# EAGLE board IOB-Signal_array (EAGLE 7.7.0)
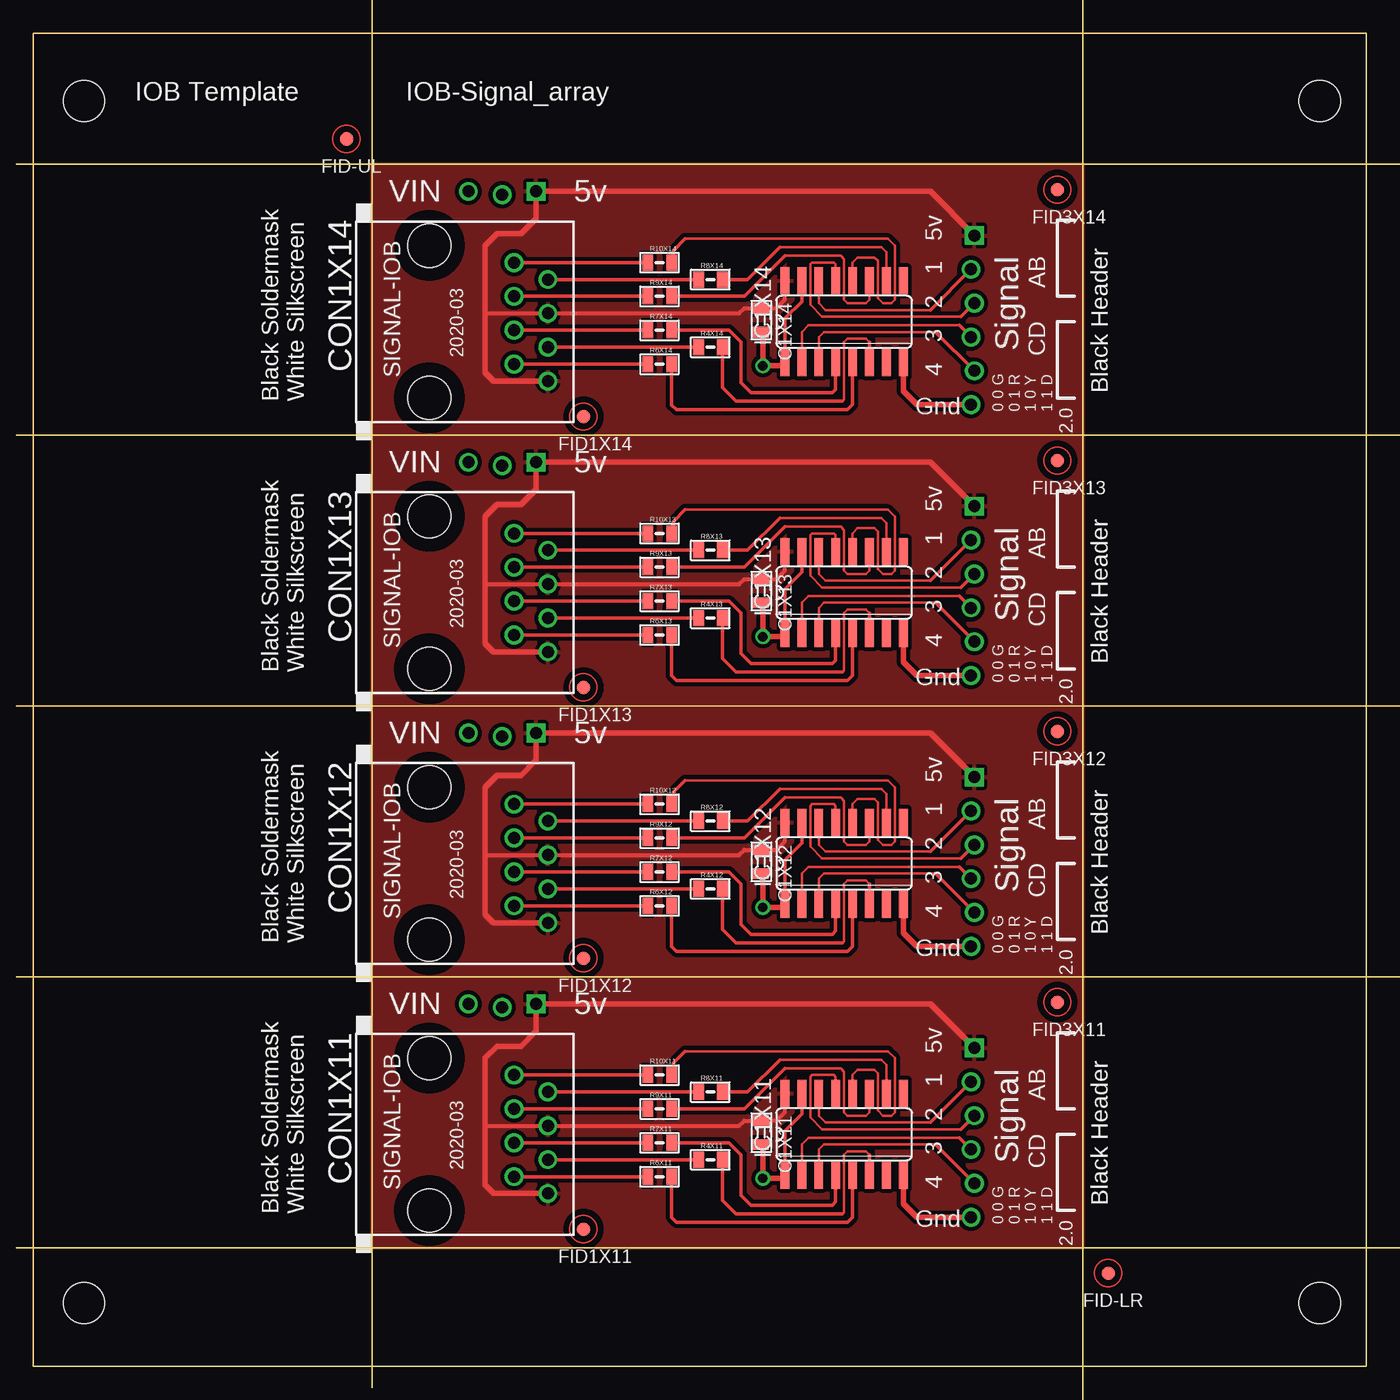
[diagram p0: board, top side]
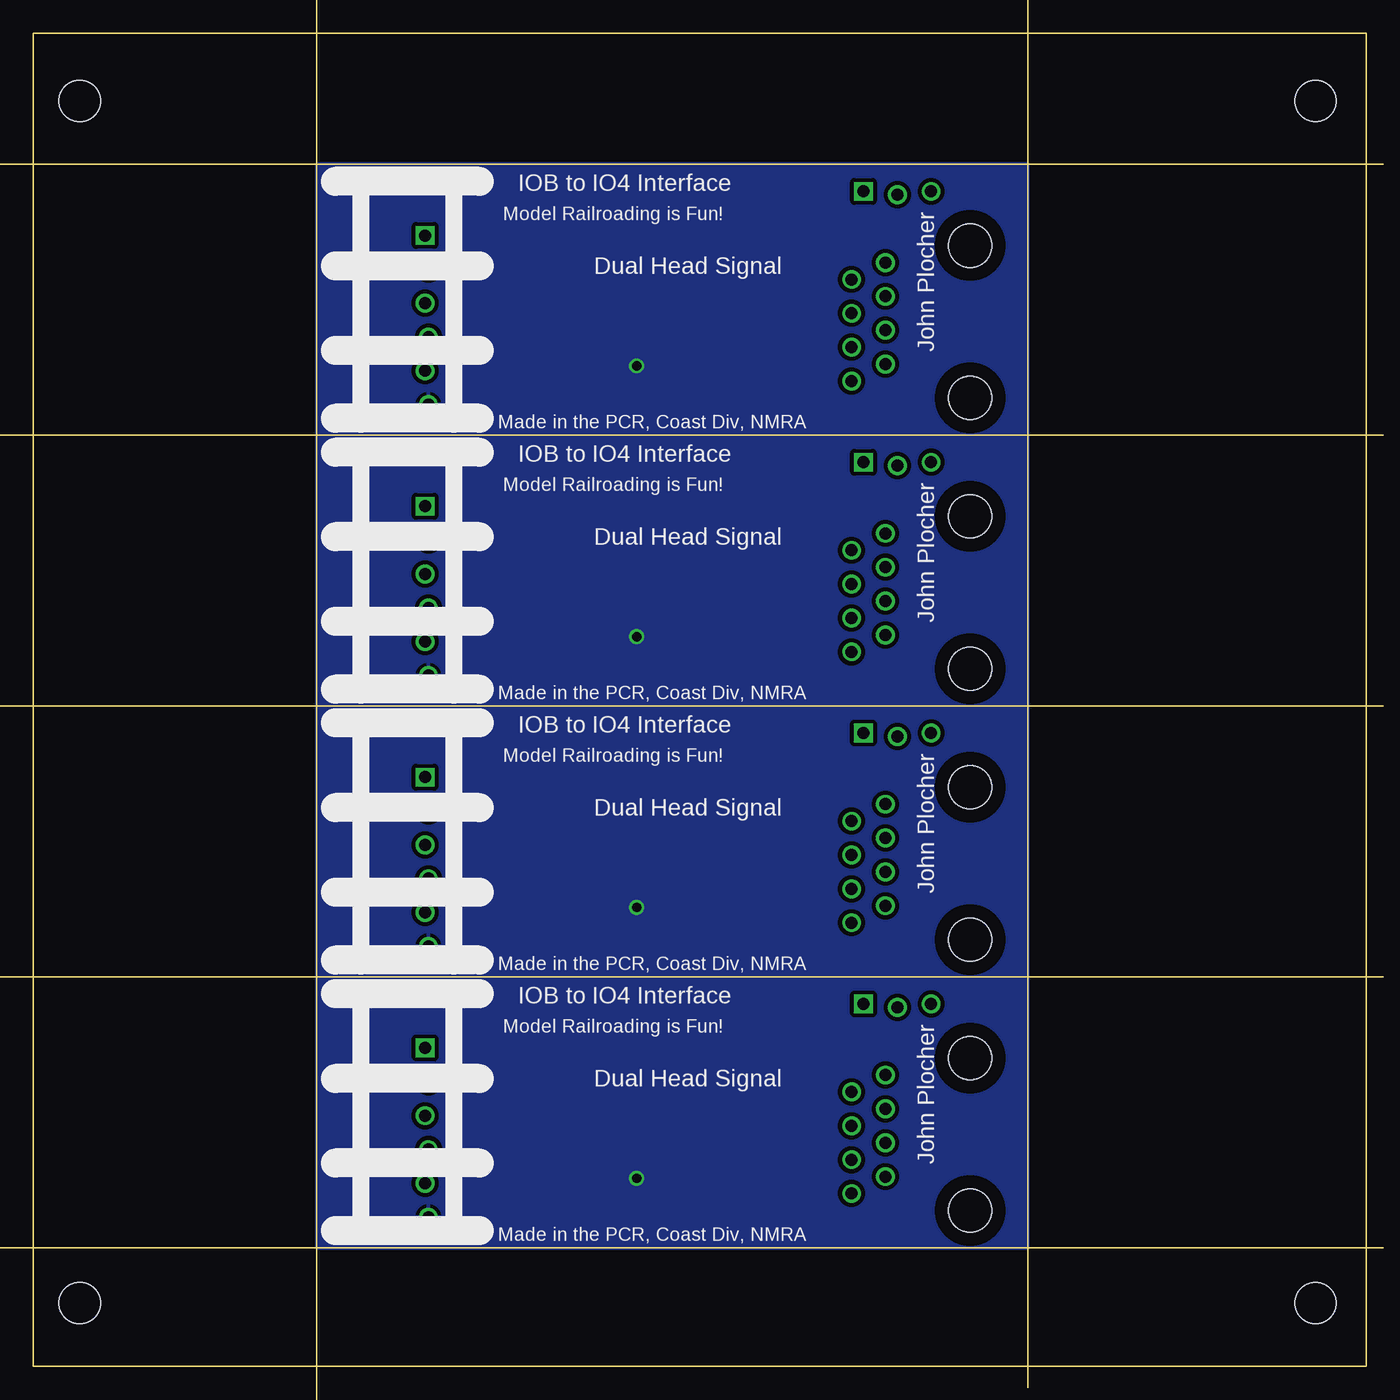
[diagram p1: board, bottom side, seen from below]

Size 100 x 100 mm. Coordinates in mm from the lower left corner, seen from the top.
Copper layers (1*16): Top 0.035mm / dielectric 1.5mm / Bottom 0.035mm
Design rules "default": minimum track width 10mil, minimum drill 0.6mm, track to track 8mil, track to pad 8mil, pad to pad 8mil, via to via 8mil, smd to smd 8mil, copper to edge 40mil, drill to drill 8mil, minimum pad ring 10mil, minimum via ring 8mil, stop-mask expansion 4mil, vias tented up to drill 0mil, thermal gap 10mil
Milling: 3 lines

## Footprints (pad centres in the part's own frame; a part is rotated, then mirrored left to right if it is on the bottom)
0805-CAP = smd 0.8 x 1.2: 1 -0.9,0; 2 0.9,0
RJ45-NO-SHIELD = drill 0.9 pad 1.4: 1 -4.445,6.35; 2 -3.175,8.89; 3 -1.905,6.35; 4 -0.635,8.89; 5 0.635,6.35; 6 1.905,8.89; 7 3.175,6.35; 8 4.445,8.89 | hole 3.251: -5.715,0; 5.715,0
FIDUCIAL_1MM = smd 1 x 1: 1 0,0
SO16 = smd 0.66 x 2.032: 1 -4.445,-3.073; 2 -3.175,-3.073; 3 -1.905,-3.073; 4 -0.635,-3.073; 5 0.635,-3.073; 6 1.905,-3.073; 7 3.175,-3.073; 8 4.445,-3.073; 9 4.445,3.073; 10 3.175,3.073; 11 1.905,3.073; 12 0.635,3.073; 13 -0.635,3.073; 14 -1.905,3.073; 15 -3.175,3.073; 16 -4.445,3.073
0805-RES = smd 0.8 x 1.2: 1 -0.9,0; 2 0.9,0
BOARD-DINRAIL-3.17IN-H4X-IOB = hole 3.1: 96.52,94.92; 96.52,4.75; 3.81,94.92; 3.81,4.75
IO4-IOB = drill 0.9: G@3 44.958,2.286; P1 44.958,12.446; P2 45.212,9.906; P3 44.958,7.366; P4 45.212,4.826; V+ 7.239,18.288; VOUT 9.779,18.034 | drill 0.9 square: V5 12.319,18.288; V5@1 45.212,14.986

## Placement (x,y rotation side)
C1X11  0.1UF  [0805-CAP]  54.61,17.53 270 top
C1X12  0.1UF  [0805-CAP]  54.61,37.85 270 top
C1X13  0.1UF  [0805-CAP]  54.61,58.17 270 top
C1X14  0.1UF  [0805-CAP]  54.61,78.49 270 top
CON1X11  RJ45  [RJ45-NO-SHIELD]  29.72,17.4 270 top
CON1X12  RJ45  [RJ45-NO-SHIELD]  29.72,37.72 270 top
CON1X13  RJ45  [RJ45-NO-SHIELD]  29.72,58.04 270 top
CON1X14  RJ45  [RJ45-NO-SHIELD]  29.72,78.36 270 top
FID1X11  FIDUCIAL  [FIDUCIAL_1MM]  41.27,10.29 0 top
FID1X12  FIDUCIAL  [FIDUCIAL_1MM]  41.27,30.61 0 top
FID1X13  FIDUCIAL  [FIDUCIAL_1MM]  41.27,50.93 0 top
FID1X14  FIDUCIAL  [FIDUCIAL_1MM]  41.27,71.25 0 top
FID3X11  FIDUCIAL  [FIDUCIAL_1MM]  76.83,27.3 0 top
FID3X12  FIDUCIAL  [FIDUCIAL_1MM]  76.83,47.62 0 top
FID3X13  FIDUCIAL  [FIDUCIAL_1MM]  76.83,67.94 0 top
FID3X14  FIDUCIAL  [FIDUCIAL_1MM]  76.83,88.27 0 top
FID-LR  FIDUCIAL  [FIDUCIAL_1MM]  80.64,6.99 0 top
FID-UL  FIDUCIAL  [FIDUCIAL_1MM]  23.5,92.08 0 top
IC1X11  74HS139A  [SO16]  60.83,17.4 0 top
IC1X12  74HS139A  [SO16]  60.83,37.72 0 top
IC1X13  74HS139A  [SO16]  60.83,58.04 0 top
IC1X14  74HS139A  [SO16]  60.83,78.36 0 top
R4X11  420R  [0805-RES]  50.8,15.49 0 top
R4X12  420R  [0805-RES]  50.8,35.81 0 top
R4X13  420R  [0805-RES]  50.8,56.13 0 top
R4X14  420R  [0805-RES]  50.8,76.45 0 top
R6X11  1K0  [0805-RES]  46.99,14.22 0 top
R6X12  1K0  [0805-RES]  46.99,34.54 0 top
R6X13  1K0  [0805-RES]  46.99,54.86 0 top
R6X14  1K0  [0805-RES]  46.99,75.18 0 top
R7X11  1K0  [0805-RES]  46.99,16.76 0 top
R7X12  1K0  [0805-RES]  46.99,37.08 0 top
R7X13  1K0  [0805-RES]  46.99,57.4 0 top
R7X14  1K0  [0805-RES]  46.99,77.72 0 top
R8X11  420R  [0805-RES]  50.8,20.57 0 top
R8X12  420R  [0805-RES]  50.8,40.89 0 top
R8X13  420R  [0805-RES]  50.8,61.21 0 top
R8X14  420R  [0805-RES]  50.8,81.53 0 top
R9X11  1K0  [0805-RES]  46.99,19.3 0 top
R9X12  1K0  [0805-RES]  46.99,39.62 0 top
R9X13  1K0  [0805-RES]  46.99,59.94 0 top
R9X14  1K0  [0805-RES]  46.99,80.26 0 top
R10X11  1K0  [0805-RES]  46.99,21.84 0 top
R10X12  1K0  [0805-RES]  46.99,42.16 0 top
R10X13  1K0  [0805-RES]  46.99,62.48 0 top
R10X14  1K0  [0805-RES]  46.99,82.8 0 top
U$1X1  [BOARD-DINRAIL-3.17IN-H4X-IOB]  0,0 0 top
U$1X11  CONNECTOR-IO4-IOBBARE  [IO4-IOB]  25.4,8.89 0 top
U$1X12  CONNECTOR-IO4-IOBBARE  [IO4-IOB]  25.4,29.21 0 top
U$1X13  CONNECTOR-IO4-IOBBARE  [IO4-IOB]  25.4,49.53 0 top
U$1X14  CONNECTOR-IO4-IOBBARE  [IO4-IOB]  25.4,69.85 0 top

## Library data of the parts
C1X11-C1X14 CON1X11-CON1X14 FID1X11-FID1X14 FID3X11-FID3X14 FID-LR FID-UL IC1X11-IC1X14 R4X11-R4X14 R6X11-R6X14 R7X11-R7X14 R8X11-R8X14 R9X11-R9X14 R10X11-R10X14 U$1X1 U$1X11-U$1X14 = SPCoast

## Nets
G1-LEDX11: CON1X11.1 R10X11.1
G1-LEDX12: CON1X12.1 R10X12.1
G1-LEDX13: CON1X13.1 R10X13.1
G1-LEDX14: CON1X14.1 R10X14.1
G1X11: IC1X11.12 R10X11.2
G1X12: IC1X12.12 R10X12.2
G1X13: IC1X13.12 R10X13.2
G1X14: IC1X14.12 R10X14.2
G2-LEDX11: CON1X11.5 R7X11.1
G2-LEDX12: CON1X12.5 R7X12.1
G2-LEDX13: CON1X13.5 R7X13.1
G2-LEDX14: CON1X14.5 R7X14.1
G2X11: IC1X11.4 R7X11.2
G2X12: IC1X12.4 R7X12.2
G2X13: IC1X13.4 R7X13.2
G2X14: IC1X14.4 R7X14.2
GNDX11: C1X11.2 IC1X11.1 IC1X11.8 IC1X11.15 U$1X11.G@3
GNDX12: C1X12.2 IC1X12.1 IC1X12.8 IC1X12.15 U$1X12.G@3
GNDX13: C1X13.2 IC1X13.1 IC1X13.8 IC1X13.15 U$1X13.G@3
GNDX14: C1X14.2 IC1X14.1 IC1X14.8 IC1X14.15 U$1X14.G@3
P1X11: IC1X11.14 U$1X11.P1
P1X12: IC1X12.14 U$1X12.P1
P1X13: IC1X13.14 U$1X13.P1
P1X14: IC1X14.14 U$1X14.P1
P2X11: IC1X11.13 U$1X11.P2
P2X12: IC1X12.13 U$1X12.P2
P2X13: IC1X13.13 U$1X13.P2
P2X14: IC1X14.13 U$1X14.P2
P3X11: IC1X11.2 U$1X11.P3
P3X12: IC1X12.2 U$1X12.P3
P3X13: IC1X13.2 U$1X13.P3
P3X14: IC1X14.2 U$1X14.P3
P4X11: IC1X11.3 U$1X11.P4
P4X12: IC1X12.3 U$1X12.P4
P4X13: IC1X13.3 U$1X13.P4
P4X14: IC1X14.3 U$1X14.P4
R1-LEDX11: CON1X11.3 R9X11.1
R1-LEDX12: CON1X12.3 R9X12.1
R1-LEDX13: CON1X13.3 R9X13.1
R1-LEDX14: CON1X14.3 R9X14.1
R1X11: IC1X11.11 R9X11.2
R1X12: IC1X12.11 R9X12.2
R1X13: IC1X13.11 R9X13.2
R1X14: IC1X14.11 R9X14.2
R2-LEDX11: CON1X11.7 R6X11.1
R2-LEDX12: CON1X12.7 R6X12.1
R2-LEDX13: CON1X13.7 R6X13.1
R2-LEDX14: CON1X14.7 R6X14.1
R2X11: IC1X11.5 R6X11.2
R2X12: IC1X12.5 R6X12.2
R2X13: IC1X13.5 R6X13.2
R2X14: IC1X14.5 R6X14.2
VCCIOX11: U$1X11.V+
VCCIOX12: U$1X12.V+
VCCIOX13: U$1X13.V+
VCCIOX14: U$1X14.V+
VCCX11: C1X11.1 CON1X11.4 CON1X11.8 IC1X11.16 U$1X11.V5 U$1X11.V5@1
VCCX12: C1X12.1 CON1X12.4 CON1X12.8 IC1X12.16 U$1X12.V5 U$1X12.V5@1
VCCX13: C1X13.1 CON1X13.4 CON1X13.8 IC1X13.16 U$1X13.V5 U$1X13.V5@1
VCCX14: C1X14.1 CON1X14.4 CON1X14.8 IC1X14.16 U$1X14.V5 U$1X14.V5@1
Y1-LEDX11: CON1X11.2 R8X11.1
Y1-LEDX12: CON1X12.2 R8X12.1
Y1-LEDX13: CON1X13.2 R8X13.1
Y1-LEDX14: CON1X14.2 R8X14.1
Y1X11: IC1X11.10 R8X11.2
Y1X12: IC1X12.10 R8X12.2
Y1X13: IC1X13.10 R8X13.2
Y1X14: IC1X14.10 R8X14.2
Y2-LEDX11: CON1X11.6 R4X11.1
Y2-LEDX12: CON1X12.6 R4X12.1
Y2-LEDX13: CON1X13.6 R4X13.1
Y2-LEDX14: CON1X14.6 R4X14.1
Y2X11: IC1X11.6 R4X11.2
Y2X12: IC1X12.6 R4X12.2
Y2X13: IC1X13.6 R4X13.2
Y2X14: IC1X14.6 R4X14.2

## Tracks (layer width: path | path; a pad name or v marks a point on that pad's centre or on a via)
G1-LEDX11
  Top 0.254: CON1X11.1 R10X11.1
G1-LEDX12
  Top 0.254: CON1X12.1 R10X12.1
G1-LEDX13
  Top 0.254: CON1X13.1 R10X13.1
G1-LEDX14
  Top 0.254: CON1X14.1 R10X14.1
G1X11
  Top 0.203: IC1X11.12 61.47,21.84 61.85,22.23 63.12,22.23 63.37,21.97 63.37,19.18 63.75,18.8 64.39,18.8 64.64,19.05 64.64,23.11 64.14,23.62 48.9,23.62
  Top 0.254: R10X11.2 48.02,22.74 48.9,23.62
G1X12
  Top 0.203: IC1X12.12 61.47,42.16 61.85,42.55 63.12,42.55 63.37,42.29 63.37,39.5 63.75,39.12 64.39,39.12 64.64,39.37 64.64,43.43 64.14,43.94 48.9,43.94
  Top 0.254: R10X12.2 48.02,43.06 48.9,43.94
G1X13
  Top 0.203: IC1X13.12 61.47,62.48 61.85,62.87 63.12,62.87 63.37,62.61 63.37,59.82 63.75,59.44 64.39,59.44 64.64,59.69 64.64,63.75 64.14,64.26 48.9,64.26
  Top 0.254: R10X13.2 48.02,63.38 48.9,64.26
G1X14
  Top 0.203: IC1X14.12 61.47,82.8 61.85,83.19 63.12,83.19 63.37,82.93 63.37,80.14 63.75,79.76 64.39,79.76 64.64,80.01 64.64,84.07 64.14,84.58 48.9,84.58
  Top 0.254: R10X14.2 48.02,83.7 48.9,84.58
G2-LEDX11
  Top 0.254: CON1X11.5 R7X11.1
G2-LEDX12
  Top 0.254: CON1X12.5 R7X12.1
G2-LEDX13
  Top 0.254: CON1X13.5 R7X13.1
G2-LEDX14
  Top 0.254: CON1X14.5 R7X14.1
G2X11
  Top 0.254: R7X11.2 52.2,16.76 53.09,15.88 53.09,12.83 53.85,12.06 59.94,12.06 60.2,12.32 IC1X11.4
G2X12
  Top 0.254: R7X12.2 52.2,37.08 53.09,36.2 53.09,33.15 53.85,32.38 59.94,32.38 60.2,32.64 IC1X12.4
G2X13
  Top 0.254: R7X13.2 52.2,57.4 53.09,56.52 53.09,53.47 53.85,52.7 59.94,52.7 60.2,52.96 IC1X13.4
G2X14
  Top 0.254: R7X14.2 52.2,77.72 53.09,76.83 53.09,73.79 53.85,73.03 59.94,73.03 60.2,73.28 IC1X14.4
GNDX11  (via drill 0.7 pad 1.11)
  Top 0.254: IC1X11.15 57.66,18.92 56.39,17.65 IC1X11.1 | C1X11.2 54.62,16.64
  Top 0.406: IC1X11.8 65.28,12.19 66.29,11.18 U$1X11.G@3 | 54.62,16.64 54.74,16.52 v54.74,14.1 56.16,14.1 IC1X11.1
  pour Bottom (isolate 0.305): 25.4,8.89 25.4,29.21 78.74,29.21 78.74,8.89
GNDX12  (via drill 0.7 pad 1.11)
  Top 0.254: IC1X12.15 57.66,39.24 56.39,37.97 IC1X12.1 | C1X12.2 54.62,36.96
  Top 0.406: IC1X12.8 65.28,32.51 66.29,31.5 U$1X12.G@3 | 54.62,36.96 54.74,36.84 v54.74,34.42 56.16,34.42 IC1X12.1
  pour Bottom (isolate 0.305): 25.4,29.21 25.4,49.53 78.74,49.53 78.74,29.21
GNDX13  (via drill 0.7 pad 1.11)
  Top 0.254: IC1X13.15 57.66,59.56 56.39,58.29 IC1X13.1 | C1X13.2 54.62,57.28
  Top 0.406: IC1X13.8 65.28,52.83 66.29,51.82 U$1X13.G@3 | 54.62,57.28 54.74,57.16 v54.74,54.74 56.16,54.74 IC1X13.1
  pour Bottom (isolate 0.305): 25.4,49.53 25.4,69.85 78.74,69.85 78.74,49.53
GNDX14  (via drill 0.7 pad 1.11)
  Top 0.254: IC1X14.15 57.66,79.88 56.39,78.61 IC1X14.1 | C1X14.2 54.62,77.6
  Top 0.406: IC1X14.8 65.28,73.15 66.29,72.14 U$1X14.G@3 | 54.62,77.6 54.74,77.48 v54.74,75.06 56.16,75.06 IC1X14.1
  pour Bottom (isolate 0.305): 25.4,69.85 25.4,90.17 78.74,90.17 78.74,69.85
P1X11
  Top 0.203: 67.31,18.29 59.44,18.29 58.93,18.8 IC1X11.14
  Top 0.254: 67.31,18.29 U$1X11.P1
P1X12
  Top 0.203: 67.31,38.61 59.44,38.61 58.93,39.12 IC1X12.14
  Top 0.254: 67.31,38.61 U$1X12.P1
P1X13
  Top 0.203: 67.31,58.93 59.44,58.93 58.93,59.44 IC1X13.14
  Top 0.254: 67.31,58.93 U$1X13.P1
P1X14
  Top 0.203: 67.31,79.25 59.44,79.25 58.93,79.76 IC1X14.14
  Top 0.254: 67.31,79.25 U$1X14.P1
P2X11
  Top 0.203: 69.6,17.78 59.18,17.78 58.29,18.67 58.29,21.72 58.42,21.84 60.07,21.84 60.2,21.72 IC1X11.13
  Top 0.254: 69.6,17.78 U$1X11.P2
P2X12
  Top 0.203: 69.6,38.1 59.18,38.1 58.29,38.99 58.29,42.04 58.42,42.16 60.07,42.16 60.2,42.04 IC1X12.13
  Top 0.254: 69.6,38.1 U$1X12.P2
P2X13
  Top 0.203: 69.6,58.42 59.18,58.42 58.29,59.31 58.29,62.36 58.42,62.48 60.07,62.48 60.2,62.36 IC1X13.13
  Top 0.254: 69.6,58.42 U$1X13.P2
P2X14
  Top 0.203: 69.6,78.74 59.18,78.74 58.29,79.63 58.29,82.68 58.42,82.8 60.07,82.8 60.2,82.68 IC1X14.13
  Top 0.254: 69.6,78.74 U$1X14.P2
P3X11
  Top 0.203: 69.47,17.14 58.17,17.14 57.66,16.64 IC1X11.2
  Top 0.254: 69.47,17.14 U$1X11.P3
P3X12
  Top 0.203: 69.47,37.47 58.17,37.47 57.66,36.96 IC1X12.2
  Top 0.254: 69.47,37.47 U$1X12.P3
P3X13
  Top 0.203: 69.47,57.78 58.17,57.78 57.66,57.28 IC1X13.2
  Top 0.254: 69.47,57.78 U$1X13.P3
P3X14
  Top 0.203: 69.47,78.11 58.17,78.11 57.66,77.6 IC1X14.2
  Top 0.254: 69.47,78.11 U$1X14.P3
P4X11
  Top 0.203: 67.69,16.64 59.31,16.64 58.93,16.26 IC1X11.3
  Top 0.254: 67.69,16.64 U$1X11.P4
P4X12
  Top 0.203: 67.69,36.96 59.31,36.96 58.93,36.58 IC1X12.3
  Top 0.254: 67.69,36.96 U$1X12.P4
P4X13
  Top 0.203: 67.69,57.28 59.31,57.28 58.93,56.9 IC1X13.3
  Top 0.254: 67.69,57.28 U$1X13.P4
P4X14
  Top 0.203: 67.69,77.6 59.31,77.6 58.93,77.22 IC1X14.3
  Top 0.254: 67.69,77.6 U$1X14.P4
R1-LEDX11
  Top 0.254: CON1X11.3 R9X11.1
R1-LEDX12
  Top 0.254: CON1X12.3 R9X12.1
R1-LEDX13
  Top 0.254: CON1X13.3 R9X13.1
R1-LEDX14
  Top 0.254: CON1X14.3 R9X14.1
R1X11
  Top 0.203: IC1X11.11 62.74,19.05 62.48,18.8 61.09,18.8 60.83,19.05 60.83,22.1 60.58,22.35 56.39,22.35
  Top 0.254: R9X11.2 53.34,19.3 56.39,22.35
R1X12
  Top 0.203: IC1X12.11 62.74,39.37 62.48,39.12 61.09,39.12 60.83,39.37 60.83,42.42 60.58,42.67 56.39,42.67
  Top 0.254: R9X12.2 53.34,39.62 56.39,42.67
R1X13
  Top 0.203: IC1X13.11 62.74,59.69 62.48,59.44 61.09,59.44 60.83,59.69 60.83,62.74 60.58,62.99 56.39,62.99
  Top 0.254: R9X13.2 53.34,59.94 56.39,62.99
R1X14
  Top 0.203: IC1X14.11 62.74,80.01 62.48,79.76 61.09,79.76 60.83,80.01 60.83,83.06 60.58,83.31 56.39,83.31
  Top 0.254: R9X14.2 53.34,80.26 56.39,83.31
R2-LEDX11
  Top 0.254: CON1X11.7 R6X11.1
R2-LEDX12
  Top 0.254: CON1X12.7 R6X12.1
R2-LEDX13
  Top 0.254: CON1X13.7 R6X13.1
R2-LEDX14
  Top 0.254: CON1X14.7 R6X14.1
R2X11
  Top 0.254: R6X11.2 47.89,11.16 48.26,10.79 61.09,10.79 61.47,11.18 IC1X11.5
R2X12
  Top 0.254: R6X12.2 47.89,31.48 48.26,31.11 61.09,31.11 61.47,31.5 IC1X12.5
R2X13
  Top 0.254: R6X13.2 47.89,51.8 48.26,51.44 61.09,51.44 61.47,51.82 IC1X13.5
R2X14
  Top 0.254: R6X14.2 47.89,72.12 48.26,71.75 61.09,71.75 61.47,72.14 IC1X14.5
VCCX11
  Top 0.305: IC1X11.16 56.39,19.05 55.76,18.43 C1X11.1 54.6,18.41 53.34,18.41 52.96,18.03 33.91,18.03
  Top 0.406: CON1X11.8 34.54,12.95 33.91,13.59 33.91,18.03 33.91,23.11 34.8,24 36.58,24 37.72,25.15 U$1X11.V5 67.31,27.18 U$1X11.V5@1
  pour Top (isolate 0.305): 25.4,8.89 25.4,29.21 78.74,29.21 78.74,8.89
VCCX12
  Top 0.305: IC1X12.16 56.39,39.37 55.76,38.75 C1X12.1 54.6,38.73 53.34,38.73 52.96,38.35 33.91,38.35
  Top 0.406: CON1X12.8 34.54,33.27 33.91,33.91 33.91,38.35 33.91,43.43 34.8,44.32 36.58,44.32 37.72,45.47 U$1X12.V5 67.31,47.5 U$1X12.V5@1
  pour Top (isolate 0.305): 25.4,29.21 25.4,49.53 78.74,49.53 78.74,29.21
VCCX13
  Top 0.305: IC1X13.16 56.39,59.69 55.76,59.07 C1X13.1 54.6,59.05 53.34,59.05 52.96,58.67 33.91,58.67
  Top 0.406: CON1X13.8 34.54,53.59 33.91,54.23 33.91,58.67 33.91,63.75 34.8,64.64 36.58,64.64 37.72,65.79 U$1X13.V5 67.31,67.82 U$1X13.V5@1
  pour Top (isolate 0.305): 25.4,49.53 25.4,69.85 78.74,69.85 78.74,49.53
VCCX14
  Top 0.305: IC1X14.16 56.39,80.01 55.76,79.39 C1X14.1 54.6,79.38 53.34,79.38 52.96,78.99 33.91,78.99
  Top 0.406: CON1X14.8 34.54,73.91 33.91,74.55 33.91,78.99 33.91,84.07 34.8,84.96 36.58,84.96 37.72,86.11 U$1X14.V5 67.31,88.14 U$1X14.V5@1
  pour Top (isolate 0.305): 25.4,69.85 25.4,90.17 78.74,90.17 78.74,69.85
Y1-LEDX11
  Top 0.254: CON1X11.2 R8X11.1
Y1-LEDX12
  Top 0.254: CON1X12.2 R8X12.1
Y1-LEDX13
  Top 0.254: CON1X13.2 R8X13.1
Y1-LEDX14
  Top 0.254: CON1X14.2 R8X14.1
Y1X11
  Top 0.203: 56.01,22.99 63.63,22.99 64.01,22.61 IC1X11.10
  Top 0.254: R8X11.2 53.59,20.57 56.01,22.99
Y1X12
  Top 0.203: 56.01,43.31 63.63,43.31 64.01,42.93 IC1X12.10
  Top 0.254: R8X12.2 53.59,40.89 56.01,43.31
Y1X13
  Top 0.203: 56.01,63.63 63.63,63.63 64.01,63.25 IC1X13.10
  Top 0.254: R8X13.2 53.59,61.21 56.01,63.63
Y1X14
  Top 0.203: 56.01,83.95 63.63,83.95 64.01,83.57 IC1X14.10
  Top 0.254: R8X14.2 53.59,81.53 56.01,83.95
Y2-LEDX11
  Top 0.254: CON1X11.6 R4X11.1
Y2-LEDX12
  Top 0.254: CON1X12.6 R4X12.1
Y2-LEDX13
  Top 0.254: CON1X13.6 R4X13.1
Y2-LEDX14
  Top 0.254: CON1X14.6 R4X14.1
Y2X11
  Top 0.203: 62.74,15.88 62.48,16.13 61.09,16.13 60.83,15.88 60.83,11.56 60.71,11.43
  Top 0.254: R4X11.2 51.69,13.58 51.69,12.45 52.7,11.43 60.71,11.43 | IC1X11.6 62.74,15.88
Y2X12
  Top 0.203: 62.74,36.2 62.48,36.45 61.09,36.45 60.83,36.2 60.83,31.88 60.71,31.75
  Top 0.254: R4X12.2 51.69,33.9 51.69,32.77 52.7,31.75 60.71,31.75 | IC1X12.6 62.74,36.2
Y2X13
  Top 0.203: 62.74,56.52 62.48,56.77 61.09,56.77 60.83,56.52 60.83,52.2 60.71,52.07
  Top 0.254: R4X13.2 51.69,54.22 51.69,53.09 52.7,52.07 60.71,52.07 | IC1X13.6 62.74,56.52
Y2X14
  Top 0.203: 62.74,76.83 62.48,77.09 61.09,77.09 60.83,76.83 60.83,72.52 60.71,72.39
  Top 0.254: R4X14.2 51.69,74.54 51.69,73.41 52.7,72.39 60.71,72.39 | IC1X14.6 62.74,76.83

## Text on the board
tPlace: AB | 2020-03 | Signal | CD | SIGNAL-IOB | Black Header | Black Soldermask / White Silkscreen | 0 0 G / 0 1 R / 1 0 Y / 1 1 D | 2.0 | AB | Signal | 2020-03 | CD | SIGNAL-IOB | Black Header | Black Soldermask / White Silkscreen | 0 0 G / 0 1 R / 1 0 Y / 1 1 D | 2.0 | AB | Signal | 2020-03 | CD | SIGNAL-IOB | Black Soldermask / White Silkscreen | Black Header | 0 0 G / 0 1 R / 1 0 Y / 1 1 D | 2.0 | AB | 2020-03 | Signal | CD | SIGNAL-IOB | Black Header | Black Soldermask / White Silkscreen | 0 0 G / 0 1 R / 1 0 Y / 1 1 D | 2.0
bPlace: John Plocher | Dual Head Signal | John Plocher | Dual Head Signal | John Plocher | Dual Head Signal | John Plocher | Dual Head Signal
_tNames: CON1 | R10 | R8 | R9 | C1 | R7 | R4 | R6 | IC1 | CON1 | R10 | R8 | R9 | C1 | R7 | R4 | R6 | IC1 | CON1 | R10 | R8 | R9 | C1 | R7 | R4 | R6 | IC1 | CON1 | R10 | R8 | R9 | C1 | R7 | R4 | R6 | IC1